# EAGLE board combo_step_gd (EAGLE 7.2.0)
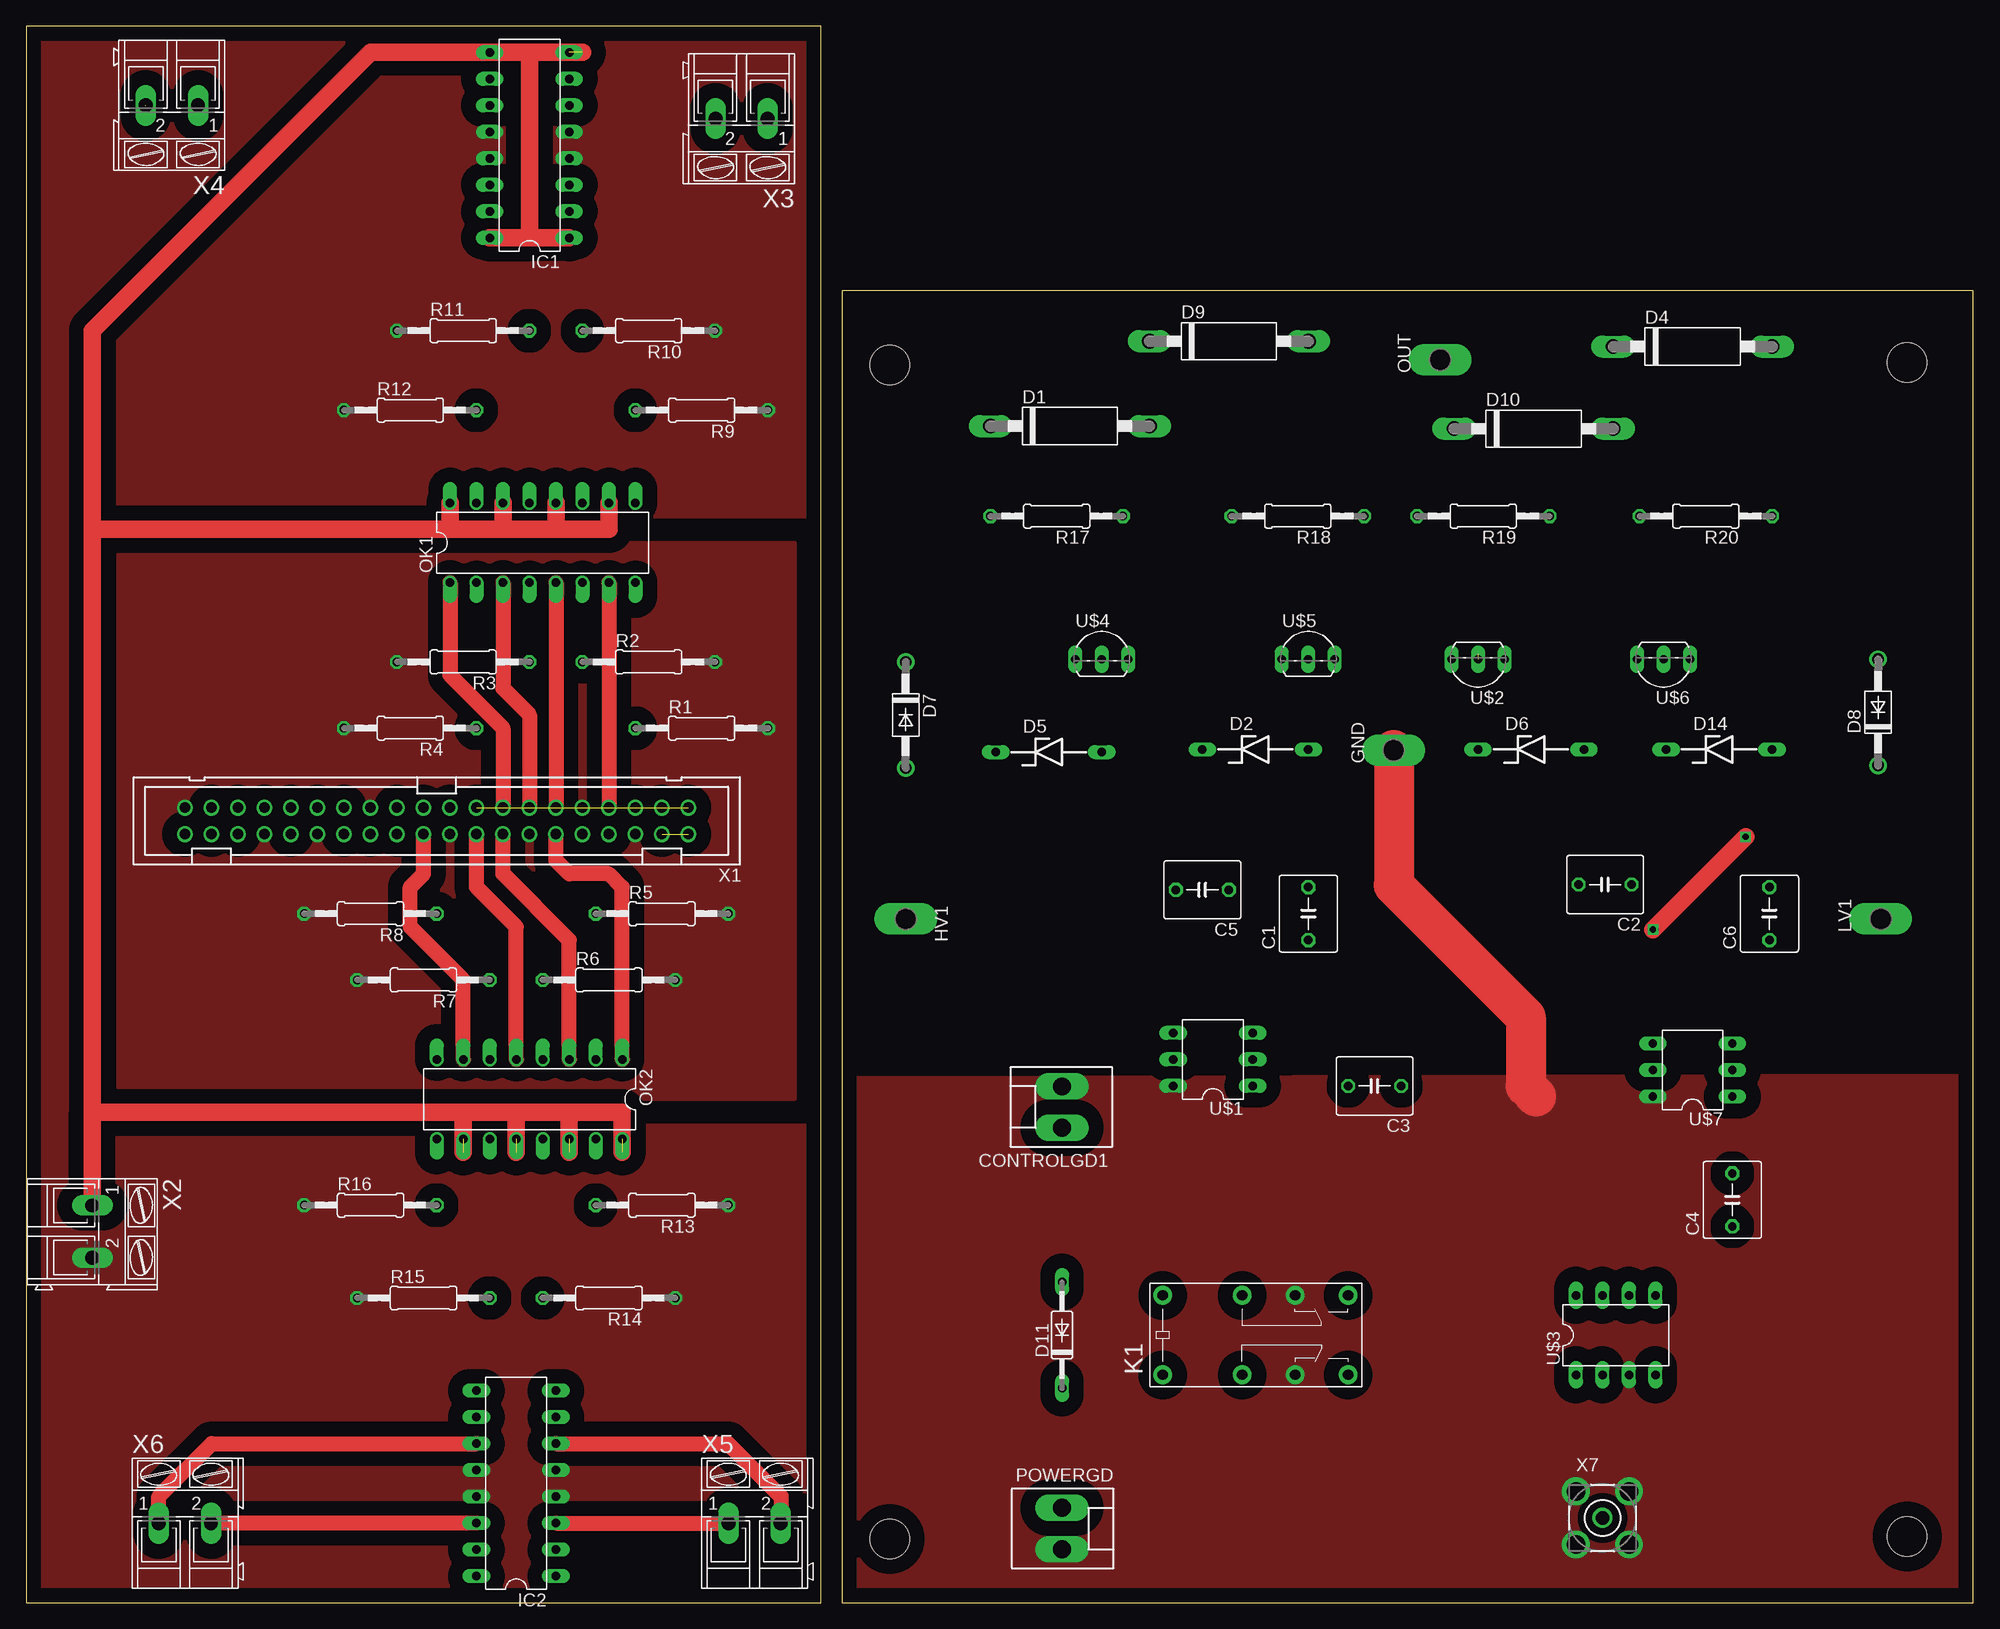
[diagram p0: board, top side]
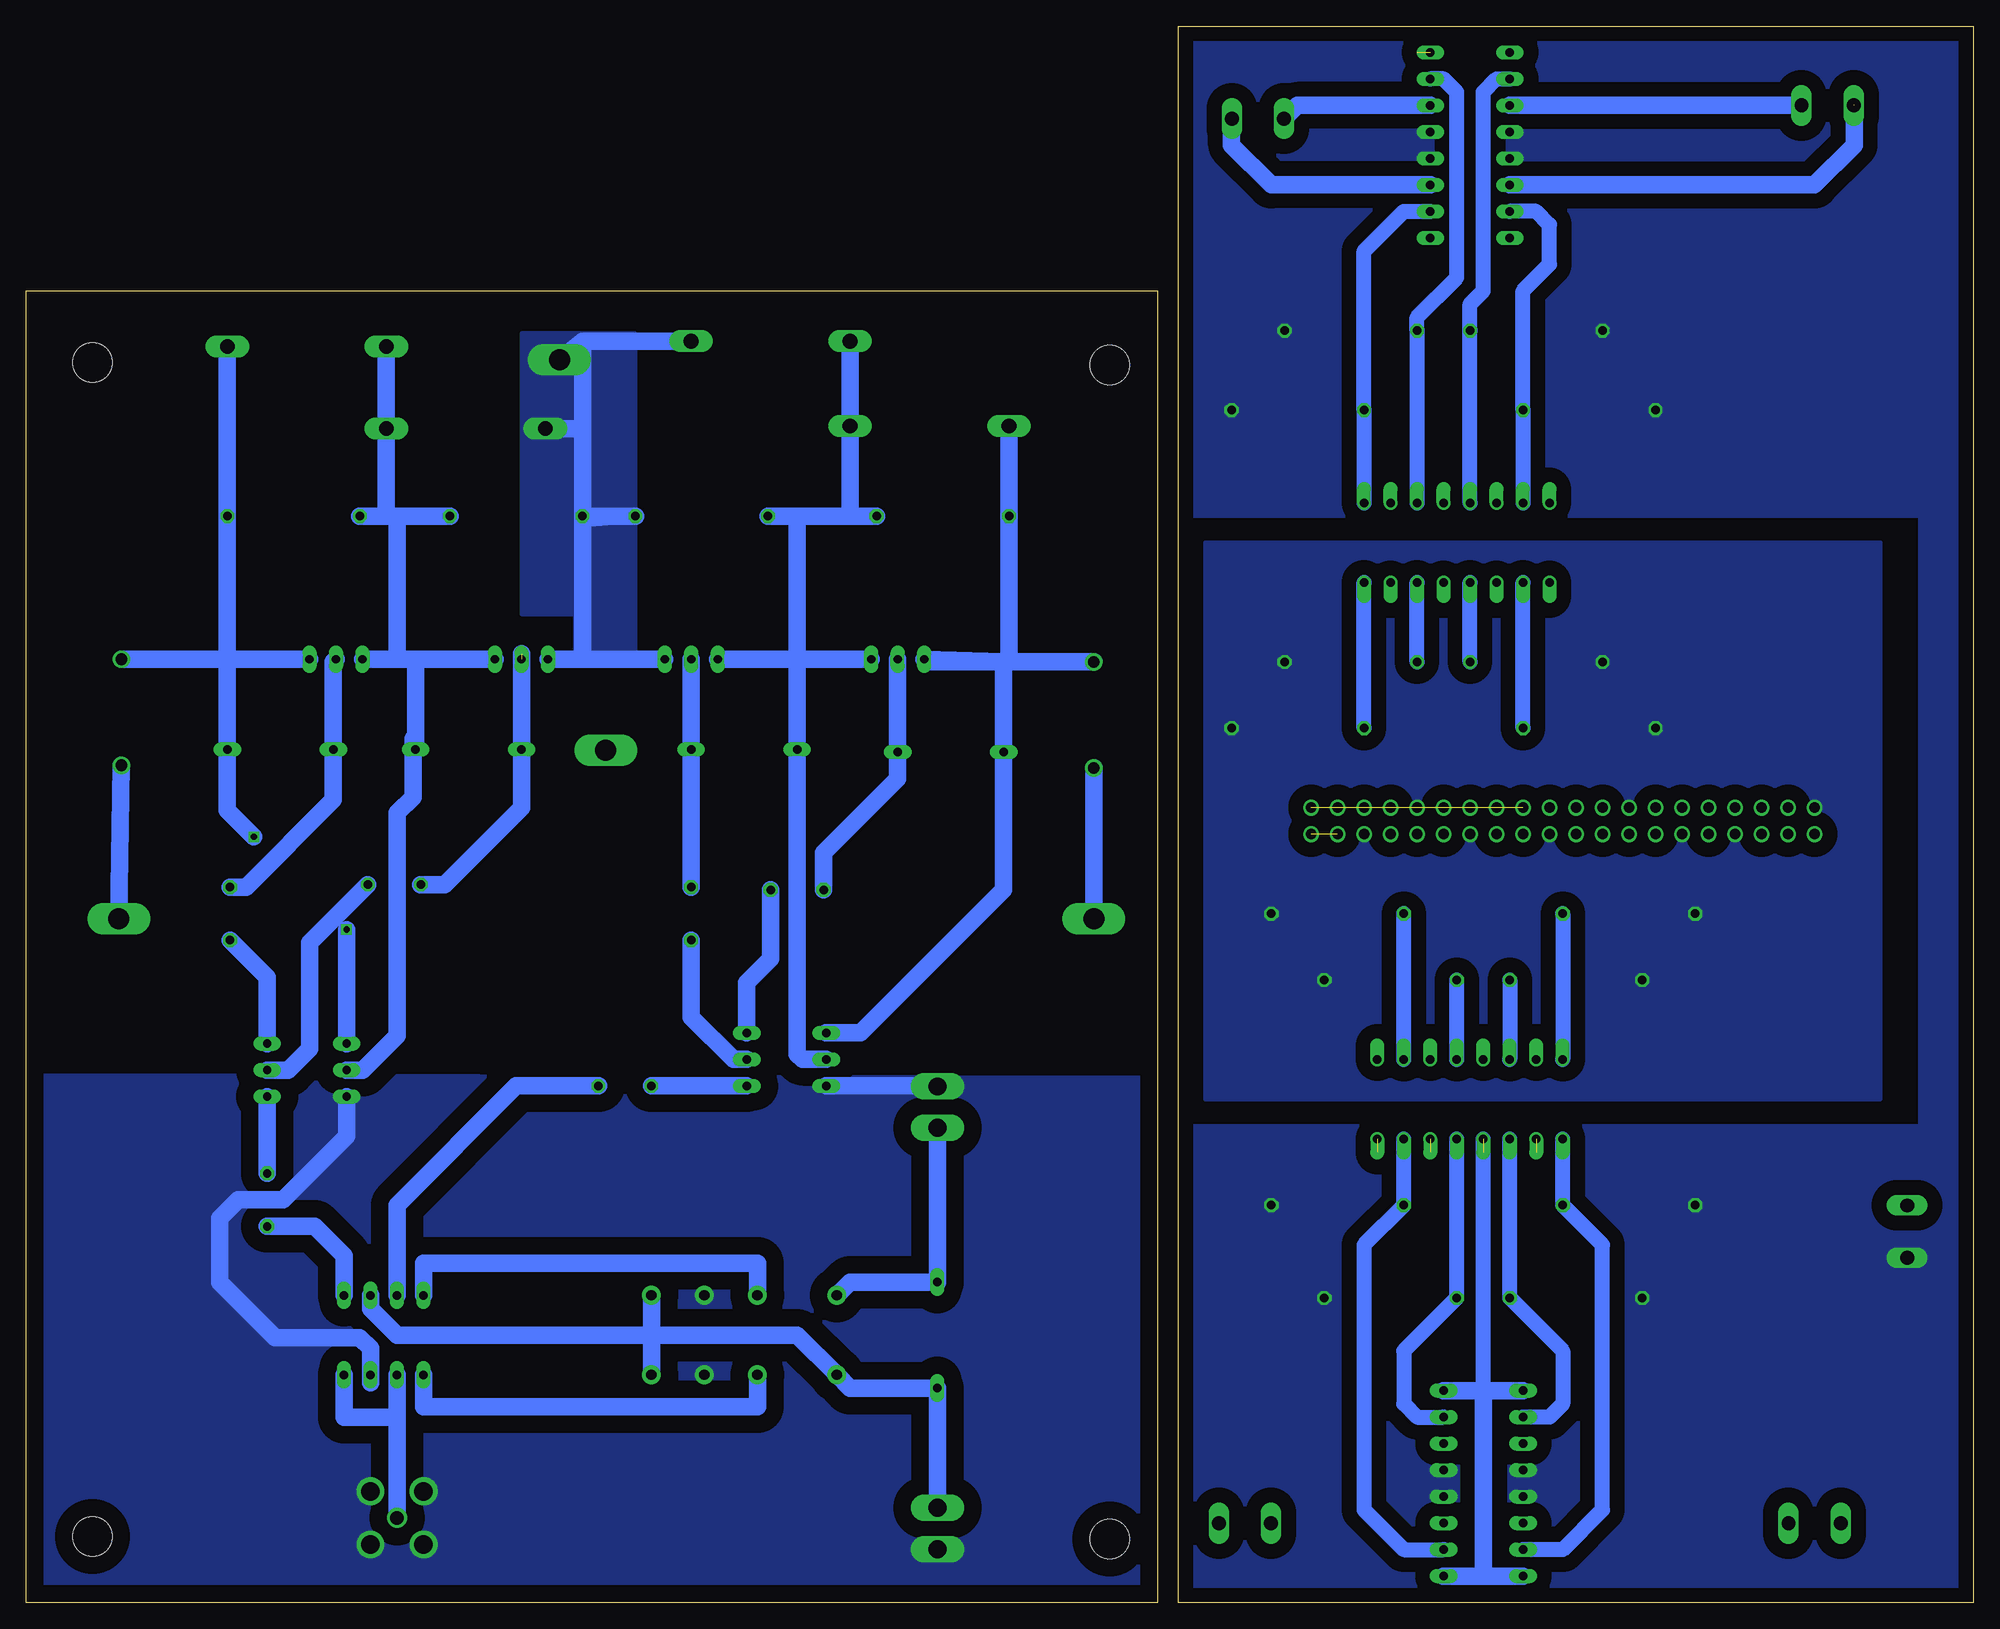
[diagram p1: board, bottom side, seen from below]

Size 186.69 x 151.11 mm. Coordinates in mm from the lower left corner, seen from the top.
Outline: 76.2,0 76.2,151.11 0,151.11 0,0 76.2,0
Outline: 186.69,0 186.69,125.73 78.23,125.73 78.23,0 186.69,0
Copper layers (1*16): Top 0.035mm / dielectric 1.5mm / Bottom 0.035mm
Design rules "default": minimum track width 10mil, minimum drill 24mil, track to track 8mil, track to pad 8mil, pad to pad 8mil, via to via 8mil, smd to smd 8mil, copper to edge 40mil, drill to drill 8mil, minimum pad ring 10mil, minimum via ring 8mil, stop-mask expansion 4mil, vias tented up to drill 0mil, thermal gap 10mil
Holes 3.8 mm at 82.8,118.62 180.34,118.87 180.34,6.35 82.8,6.1

## Footprints (pad centres in the part's own frame; a part is rotated, then mirrored left to right if it is on the bottom)
C050-055X075 = drill 0.813 octagon: 1 -2.54,0; 2 2.54,0
KK-156-2 = drill 1.7 pad 2.184 long: 1 -1.98,0; 2 1.98,0
C1702-15 = drill 1.397 long: A 7.62,0; C -7.62,0
ZDIO-10 = drill 0.813 long: A 5.08,0; C -5.08,0
DO41-10 = drill 1.118: A 5.08,0; C -5.08,0
DO35-10 = drill 0.813 long: A 5.08,0; C -5.08,0
P1-20Y = drill 2.007 pad 2.54 long: TP 0,0
DIL16 = drill 0.813 long: 1 -8.89,-3.81; 2 -6.35,-3.81; 3 -3.81,-3.81; 4 -1.27,-3.81; 5 1.27,-3.81; 6 3.81,-3.81; 7 6.35,-3.81; 8 8.89,-3.81; 9 8.89,3.81; 10 6.35,3.81; 11 3.81,3.81; 12 1.27,3.81; 13 -1.27,3.81; 14 -3.81,3.81; 15 -6.35,3.81; 16 -8.89,3.81
G5V-2 = drill 1 pad 1.8: 1 -8.89,-3.81; 4 -1.27,-3.81; 6 3.81,-3.81; 8 8.89,-3.81; 9 8.89,3.81; 11 3.81,3.81; 13 -1.27,3.81; 16 -8.89,3.81
DIL16' = drill 0.813 offset: 1 -8.89,-3.81; 2 -6.35,-3.81; 3 -3.81,-3.81; 4 -1.27,-3.81; 5 1.27,-3.81; 6 3.81,-3.81; 7 6.35,-3.81; 8 8.89,-3.81; 9 8.89,3.81; 10 6.35,3.81; 11 3.81,3.81; 12 1.27,3.81; 13 -1.27,3.81; 14 -3.81,3.81; 15 -6.35,3.81; 16 -8.89,3.81
0207/12 = drill 0.813 octagon: 1 -6.35,0; 2 6.35,0
DIL06 = drill 0.813 long: 1 -2.54,-3.81; 2 0,-3.81; 3 2.54,-3.81; 4 2.54,3.81; 5 0,3.81; 6 -2.54,3.81
TO92- = drill 0.813 long: 1 2.54,0; 2 0,0; 3 -2.54,0
DIL08 = drill 0.813 long: 1 -3.81,-3.81; 2 -1.27,-3.81; 3 1.27,-3.81; 4 3.81,-3.81; 5 3.81,3.81; 6 1.27,3.81; 7 -1.27,3.81; 8 -3.81,3.81
PAK100/2500-40 = drill 1 pad 1.422: 1 -24.13,-1.27; 2 -24.13,1.27; 3 -21.59,-1.27; 4 -21.59,1.27; 5 -19.05,-1.27; 6 -19.05,1.27; 7 -16.51,-1.27; 8 -16.51,1.27; 9 -13.97,-1.27; 10 -13.97,1.27; 11 -11.43,-1.27; 12 -11.43,1.27; 13 -8.89,-1.27; 14 -8.89,1.27; 15 -6.35,-1.27; 16 -6.35,1.27; 17 -3.81,-1.27; 18 -3.81,1.27; 19 -1.27,-1.27; 20 -1.27,1.27; 21 1.27,-1.27; 22 1.27,1.27; 23 3.81,-1.27; 24 3.81,1.27; 25 6.35,-1.27; 26 6.35,1.27; 27 8.89,-1.27; 28 8.89,1.27; 29 11.43,-1.27; 30 11.43,1.27; 31 13.97,-1.27; 32 13.97,1.27; 33 16.51,-1.27; 34 16.51,1.27; 35 19.05,-1.27; 36 19.05,1.27; 37 21.59,-1.27; 38 21.59,1.27; 39 24.13,-1.27; 40 24.13,1.27
AK300/2 = drill 1.321 long: 1 -2.515,0; 2 2.489,0
BU-SMA-V = drill 1.27: 1 0,0 | drill 1.778: 2 -2.55,2.55; 3 2.55,2.55; 4 2.55,-2.55; 5 -2.55,-2.55

## Placement (x,y rotation side)
C1  [C050-055X075]  122.94,66.04 90 top
C2  [C050-055X075]  151.38,68.83 180 top
C3  [C050-055X075]  129.29,49.53 180 top
C4  [C050-055X075]  163.58,38.61 90 top
C5  [C050-055X075]  112.78,68.33 180 top
C6  [C050-055X075]  167.13,66.04 90 top
CONTROLGD1  [KK-156-2]  99.31,47.5 90 top
D1  P6KEXXA  [C1702-15]  100.08,112.78 0 top
D2  4735  [ZDIO-10]  117.86,81.79 0 top
D4  P6KEXXA  [C1702-15]  159.77,120.4 0 top
D5  4735  [ZDIO-10]  98.04,81.53 0 top
D6  4735  [ZDIO-10]  144.27,81.79 0 top
D7  1N4004  [DO41-10]  84.33,85.09 270 top
D8  1N4004  [DO41-10]  177.55,85.34 90 top
D9  P6KEXXA  [C1702-15]  115.32,120.9 0 top
D10  P6KEXXA  [C1702-15]  144.53,112.52 0 top
D11  1N4148DO35-10  [DO35-10]  99.31,25.65 90 top
D14  4735  [ZDIO-10]  162.31,81.79 0 top
GND  TPPAD1-20Y  [P1-20Y]  131.11,81.71 90 top
HV1  TPPAD1-20Y  [P1-20Y]  84.33,65.53 270 top
IC1  L293D  [DIL16]  48.26,139.7 90 top
IC2  L293D  [DIL16]  46.99,11.43 90 top
K1  G5V-2  [G5V-2]  117.86,25.65 0 top
LV1  TPPAD1-20Y  [P1-20Y]  177.8,65.53 90 top
OK1  PS2501"  [DIL16']  49.53,101.6 0 top
OK2  PS2501"  [DIL16']  48.26,48.26 180 top
OUT  TPPAD1-20Y  [P1-20Y]  135.56,119.13 90 top
POWERGD  [KK-156-2]  99.31,7.11 270 top
R1  200  [0207/12]  64.77,83.82 0 top
R2  200  [0207/12]  59.69,90.17 0 top
R3  200  [0207/12]  41.91,90.17 180 top
R4  200  [0207/12]  36.83,83.82 180 top
R5  200  [0207/12]  60.96,66.04 0 top
R6  200  [0207/12]  55.88,59.69 0 top
R7  200  [0207/12]  38.1,59.69 180 top
R8  200  [0207/12]  33.02,66.04 180 top
R9  10K  [0207/12]  64.77,114.3 180 top
R10  10K  [0207/12]  59.69,121.92 180 top
R11  10K  [0207/12]  41.91,121.92 0 top
R12  10K  [0207/12]  36.83,114.3 0 top
R13  10K  [0207/12]  60.96,38.1 180 top
R14  10K  [0207/12]  55.88,29.21 180 top
R15  10K  [0207/12]  38.1,29.21 0 top
R16  10K  [0207/12]  33.02,38.1 0 top
R17  1M  [0207/12]  98.81,104.14 180 top
R18  1M  [0207/12]  121.92,104.14 180 top
R19  1M  [0207/12]  139.7,104.14 180 top
R20  1M  [0207/12]  161.04,104.14 180 top
U$1  DA-2320  [DIL06]  113.79,52.07 90 top
U$2  VN0550  [TO92-]  139.19,90.42 180 top
U$3  UCC27425  [DIL08]  152.4,25.65 0 top
U$4  VP0550  [TO92-]  103.12,90.42 0 top
U$5  VP0550  [TO92-]  122.94,90.42 0 top
U$6  VN0550  [TO92-]  156.97,90.42 180 top
U$7  DA-2320  [DIL06]  159.77,51.05 90 top
X1  2540-  [PAK100/2500-40]  39.37,74.93 180 top
X2  [AK300/2]  6.35,35.56 270 top
X3  [AK300/2]  68.58,142.24 180 top
X4  [AK300/2]  13.97,143.51 180 top
X5  [AK300/2]  69.85,7.62 0 top
X6  [AK300/2]  15.24,7.62 0 top
X7  BU-SMA-V  [BU-SMA-V]  151.13,8.13 0 top

## Library data of the parts
C1-C6 R1-R16 = resistor
CONTROLGD1 POWERGD = con-molex; OC_FARNELL: unknown; OC_NEWARK: unknown
D1 D2 D4-D11 D14 = diode
GND HV1 LV1 OUT = testpad
IC1 IC2 = st-microelectronics; MPN: L293D; OC_FARNELL: 9589619; OC_NEWARK: 56P8249
K1 = relay; MPN: G5V-2 5DC; OC_FARNELL: 9949488; OC_NEWARK: 78K5703
OK1 OK2 = optocoupler
R17-R20 = rcl
U$1 U$7 = trafo
U$2 U$4-U$6 = transistor-fet
U$3 = texas
X1 = con-3m; OC_FARNELL: unknown; OC_NEWARK: unknown
X2-X6 = con-ptr500; OC_FARNELL: unknown; OC_NEWARK: unknown
X7 = con-coax; OC_FARNELL: unknown; OC_NEWARK: unknown

## Nets
+3V3: X1.1 X1.17
+5V: X1.2 X1.4
+15V: D11.C K1.1 K1.8 K1.9 POWERGD.1 U$3.6
ENSW: CONTROLGD1.1 D11.A K1.16
GND: R1.2 R2.2 R3.2 R4.2 R5.2 R6.2 R7.2 R8.2 X1.6 X1.9 X1.14 X1.20 X1.25 X1.30 X1.34 X1.39
GND1: IC1.4 IC1.5 IC1.12 IC1.13 IC2.4 IC2.5 IC2.12 IC2.13 R9.1 R10.1 R11.1 R12.1 R13.1 R14.1 R15.1 R16.1 X2.2
GND2: CONTROLGD1.2 GND.TP K1.6 K1.11 POWERGD.2 U$1.6 U$3.3 U$7.6 X7.2 X7.3 X7.4 X7.5
GPIO5: X1.29
GPIO6: X1.31
GPIO12: X1.32
GPIO13: X1.33
GPIO16: X1.36
GPIO19: X1.35
GPIO20: X1.38
GPIO21: X1.40
GPIO26: X1.37
N$1: OK1.8 R1.1
N$2: OK1.6 R2.1
N$3: OK1.4 R3.1
N$4: OK1.2 R4.1
N$5: OK2.2 R5.1
N$6: OK2.4 R6.1
N$7: OK2.6 R7.1
N$8: OK2.8 R8.1
N$9: X1.3
N$10: X1.5
N$11: X1.8
N$12: X1.10
N$13: X1.19
N$14: X1.21
N$15: X1.23
N$16: X1.24
N$17: X1.26
N$18: X1.27
N$19: X1.28
N$20: IC1.2 OK1.9 R9.2
N$21: IC1.7 OK1.11 R10.2
N$22: IC1.10 OK1.13 R11.2
N$23: IC1.15 OK1.15 R12.2
N$24: IC2.2 OK2.15 R13.2
N$25: IC2.7 OK2.13 R14.2
N$26: IC2.10 OK2.11 R15.2
N$27: IC2.15 OK2.9 R16.2
N$28: IC1.3 X3.1
N$29: IC1.6 X3.2
N$30: IC1.14 X4.2
N$31: IC1.11 X4.1
N$32: IC2.3 X5.1
N$33: IC2.6 X5.2
N$34: IC2.11 X6.1
N$35: IC2.14 X6.2
N$36: OK1.1 X1.15
N$37: OK2.1 X1.12
N$38: OK2.3 X1.16
N$39: OK2.5 X1.18
N$40: OK2.7 X1.22
N$41: OK1.3 X1.13
N$42: OK1.5 X1.11
N$43: OK1.7 X1.7
N$44: U$3.2 U$3.4 X7.1
N$45: C3.2 U$1.1
N$46: C3.1 U$3.7
N$47: C4.1 U$3.5
N$48: K1.4 U$3.1
N$49: K1.13 U$3.8
N$50: C1.1 U$1.2
N$51: C5.1 U$1.3
N$52: C2.1 U$7.2
N$53: C6.1 U$7.3
N$54: C2.2 D6.C U$2.2
N$55: C6.2 D14.C U$6.2
N$56: C1.2 D2.A U$5.2
N$57: C5.2 D5.A U$4.2
N$58: D9.A D10.C OUT.TP R18.1 R19.2 U$2.1 U$5.1
N$59: D1.C D5.C D7.C R17.2 U$1.4 U$4.3
N$60: D1.A D2.C D9.C R17.1 R18.2 U$1.5 U$4.1 U$5.3
N$61: D7.A HV1.TP
N$62: C4.2 U$7.1
N$63: U$7.5
N$64: D8.C LV1.TP
N$65: D4.C D6.A D10.A R19.1 R20.2 U$2.3 U$6.1
N$66: D4.A D8.A D14.A R20.1 U$6.3 U$7.4
VCC: IC1.1 IC1.8 IC1.9 IC1.16 IC2.1 IC2.8 IC2.9 IC2.16 OK1.10 OK1.12 OK1.14 OK1.16 OK2.10 OK2.12 OK2.14 OK2.16 X2.1

## Tracks (layer width: path | path; a pad name or v marks a point on that pad's centre or on a via)
+3V3  (1 unrouted)
+5V  (1 unrouted)
+15V
  Bottom 1.676: POWERGD.1 D11.C 107.7,20.57 K1.1 112.78,25.65 126.75,25.65 | 126.75,25.65 151.13,25.65 153.67,28.19 U$3.6 | 126.75,25.65 K1.9 | K1.8 126.75,25.65
ENSW
  Bottom 1.676: CONTROLGD1.1 D11.A 107.7,30.73 K1.16
GND
  pour Bottom (isolate 1.422, no thermals): 8.89,48.26 8.89,101.6 73.66,101.6 73.66,48.26
  pour Top (isolate 1.422, no thermals): 8.89,48.26 8.89,101.6 73.66,101.6 73.66,48.26
GND1
  pour Bottom (isolate 1.422, no thermals): 0,0 76.2,0 76.2,45.72 5.08,45.72 5.08,104.14 76.2,104.14 76.2,151.13 0,151.13
  pour Top (isolate 1.422, no thermals): 76.2,0 76.2,45.72 7.62,45.72 7.62,104.14 76.2,104.14 76.2,151.13 0,151.13 0,0
GND2
  Top 3.81: GND.TP 131.12,68.78 143.76,56.13 143.76,49.53 144.78,48.51
  Bottom 1.676: CONTROLGD1.2 99.31,49.53 U$1.6 | U$7.6 155.96,44.7 162.05,38.61 166.37,38.61 168.15,36.83 168.15,30.73 162.81,25.4 154.69,25.4 153.67,24.38 153.67,21.08
  pour Bottom (isolate 1.676, no thermals): 78.23,-0.25 77.98,50.29 186.69,50.55 186.94,0
  pour Top (isolate 1.422, rank 6, no thermals): 78.23,0 77.98,50.29 186.69,50.55 186.94,0
N$1
  Bottom 1.422: R1.1 OK1.8
N$2
  Bottom 1.422: R2.1 OK1.6
N$3
  Bottom 1.422: R3.1 OK1.4
N$4
  Bottom 1.422: R4.1 OK1.2
N$5
  Bottom 1.422: OK2.2 R5.1
N$6
  Bottom 1.422: OK2.4 R6.1
N$7
  Bottom 1.422: R7.1 OK2.6
N$8
  Bottom 1.422: R8.1 OK2.8
N$20
  Bottom 1.422: OK1.9 R9.2 58.42,129.54 54.61,133.35 IC1.2
N$21
  Bottom 1.422: OK1.11 R10.2 53.34,123.19 49.53,127 49.53,144.78 50.8,146.05 IC1.7
N$22
  Bottom 1.422: OK1.13 R11.2 48.26,124.46 46.99,125.73 46.99,144.78 45.72,146.05 IC1.10
N$23
  Bottom 1.422: OK1.15 R12.2 43.18,125.73 40.64,128.27 40.64,132.08 41.91,133.35 IC1.15
N$24
  Bottom 1.422: OK2.15 R13.2 58.42,34.29 58.42,8.89 54.61,5.08 IC2.2
N$25
  Bottom 1.422: OK2.13 R14.2 54.61,24.13 54.61,19.05 53.34,17.78 IC2.7
N$26
  Bottom 1.422: OK2.11 R15.2 39.37,24.13 39.37,19.05 40.64,17.78 IC2.10
N$27
  Bottom 1.422: OK2.9 R16.2 35.56,34.29 35.56,8.89 39.37,5.08 IC2.15
N$28
  Bottom 1.676: IC1.3 67.31,135.89 71.12,139.7 71.12,142.22 X3.1
N$29
  Bottom 1.676: IC1.6 64.82,143.51 X3.2
N$30  (1 unrouted)
  Bottom 1.676: IC1.14 15.24,135.89 11.43,139.7 11.43,143.51
N$31
  Bottom 1.676: IC1.11 X4.1
N$32
  Top 1.422: IC2.3 X5.1
N$33
  Top 1.422: IC2.6 67.31,15.24 72.39,10.16 72.39,7.67 X5.2
N$34
  Top 1.422: X6.1 12.72,10.19 17.78,15.24 IC2.11
N$35
  Top 1.422: IC2.14 X6.2
N$36
  Top 1.422: OK1.1 40.64,88.9 45.72,83.82 X1.15
N$37
  Top 1.422: OK2.1 57.15,68.58 55.88,69.85 52.07,69.85 50.8,71.12 X1.12
N$38
  Top 1.422: OK2.3 52.07,63.5 45.72,69.85 X1.16
N$39
  Top 1.422: OK2.5 46.99,64.77 43.18,68.58 X1.18
N$40
  Top 1.422: OK2.7 41.91,59.69 36.83,64.77 36.83,68.58 38.1,69.85 X1.22
N$41
  Top 1.422: OK1.3 45.72,87.63 48.26,85.09 X1.13
N$42
  Top 1.422: OK1.5 X1.11
N$43
  Top 1.422: OK1.7 X1.7
N$44
  Bottom 1.676: X7.1 151.13,17.78 | U$3.2 151.13,17.78 | 151.13,17.78 156.21,17.78 U$3.4
N$45
  Bottom 1.676: U$1.1 C3.2
N$46
  Bottom 1.676: U$3.7 151.13,38.1 139.7,49.53 C3.1
N$47
  Bottom 1.676: U$3.5 156.21,33.27 159,36.07 C4.1
N$48
  Bottom 1.676: 148.59,21.34 U$3.1 148.59,18.8 116.59,18.8 K1.4
N$49
  Bottom 1.676: K1.13 116.59,32.51 148.59,32.51 U$3.8
N$50
  Bottom 1.676: U$1.2 118.87,52.07 122.94,56.13 C1.1
N$51
  Bottom 1.676: U$1.3 117.6,59.44 115.32,61.72 C5.1
N$52
  Bottom 1.676: U$7.2 161.54,51.05 159.51,53.09 159.51,63.25 C2.1
N$53
  Bottom 1.676: U$7.3 163.58,59.94 C6.1
N$54  (1 unrouted)
  Bottom 1.676: C2.2 146.56,68.83 139.19,76.2 D6.C 139.19,90.93
N$55
  Bottom 1.676: U$6.2 157.23,90.17 D14.C 157.23,76.96 165.61,68.58 C6.2
N$56
  Bottom 1.676: C1.2 D2.A U$5.2
N$57
  Bottom 1.676: C5.2 110.24,71.88 103.12,78.99 D5.A U$4.2
N$58
  Bottom 1.676: 133.35,90.42 U$2.1 | R18.1 130.3,104.14 | 130.3,104.14 R19.2 133.35,112.78 | D9.A 133.35,120.9 | 133.35,120.9 OUT.TP | U$5.1 133.35,90.42 | 133.35,90.42 133.35,103.89 130.3,104.14 | 133.35,112.78 133.35,120.9 | D10.C 133.6,112.52 133.35,112.78
  pour Bottom (isolate 1.676, no thermals): 128.27,89.92 128.27,121.67 139.19,121.67 139.19,94.74 134.11,94.74 134.11,89.92
N$59
  Bottom 1.676: U$1.4 106.68,54.61 92.96,68.33 D5.C 92.96,90.19 92.97,90.19 | D7.C 92.46,90.17 | 92.46,90.17 100.33,90.17 U$4.3 92.97,90.19 | 92.97,90.19 92.46,90.17 | 92.46,90.17 R17.2 D1.C
N$60
  Bottom 1.676: U$1.5 112.27,52.07 112.78,52.58 D2.C 112.78,90.42 | 112.78,104.14 R18.2 | U$4.1 112.78,90.42 | 112.78,90.42 U$5.3 | R17.1 107.7,104.14 | 112.78,104.14 112.78,90.42 | D9.C D1.A 107.7,104.14 | 107.7,104.14 112.78,104.14
N$61
  Bottom 1.676: D7.A HV1.TP
N$62
  Bottom 1.676: C4.2 U$7.1
N$63
  Bottom 1.676: U$7.5 154.43,51.05 151.13,54.36 151.13,75.69 149.61,77.22 149.61,82.8
N$64
  Bottom 1.676: LV1.TP D8.C
N$65
  Bottom 1.676: D6.A 149.35,90.42 | 149.35,90.42 U$2.3 | 149.35,90.42 151.13,90.42 | 151.13,90.42 U$6.1 | D4.C D10.A 152.15,104.14 | R19.1 151.13,104.14 | 151.13,104.14 152.15,104.14 | R20.2 152.15,104.14 | 151.13,104.14 151.13,90.42
N$66  (via drill 0.6)
  Top 1.676: v164.85,73.41 v155.96,64.52
  Bottom 1.676: 167.39,90.42 D14.A 167.39,75.95 v164.85,73.41 | 167.39,90.42 R20.1 D4.A | U$6.3 167.39,90.42 | D8.A 167.39,90.42 | v155.96,64.52 U$7.4
VCC  (5 unrouted)
  Top 1.676: X2.1 6.35,46.99 | 6.35,102.87 6.35,46.99 | 6.35,46.99 41.91,46.99 | 41.91,43.18 41.91,46.99 | 41.91,46.99 46.99,46.99 | 46.99,43.18 46.99,46.99 | 46.99,46.99 52.07,46.99 | 52.07,43.18 52.07,46.99 | 52.07,46.99 57.15,46.99 57.15,43.18 | OK1.16 40.64,102.87 | 40.64,102.87 6.35,102.87 | OK1.14 45.72,102.87 | 45.72,102.87 40.64,102.87 | OK1.12 50.8,102.87 | 50.8,102.87 45.72,102.87 | OK1.10 55.88,102.87 50.8,102.87 | 48.26,148.59 IC1.9 33.02,148.59 6.35,121.92 6.35,102.87 | 48.26,148.59 53.34,148.59 | IC1.1 48.26,130.81 | IC1.16 48.26,130.81 | 48.26,130.81 48.26,148.59
  Bottom 1.422: 46.99,20.32 OK2.12
  Bottom 1.676: IC2.1 46.99,2.54 | 46.99,2.54 IC2.16 | 46.99,20.32 IC2.8 | IC2.9 46.99,20.32 | 46.99,20.32 46.99,2.54